# EAGLE board Cansat-2023-2 (EAGLE 9.4.2), part 1 of 2
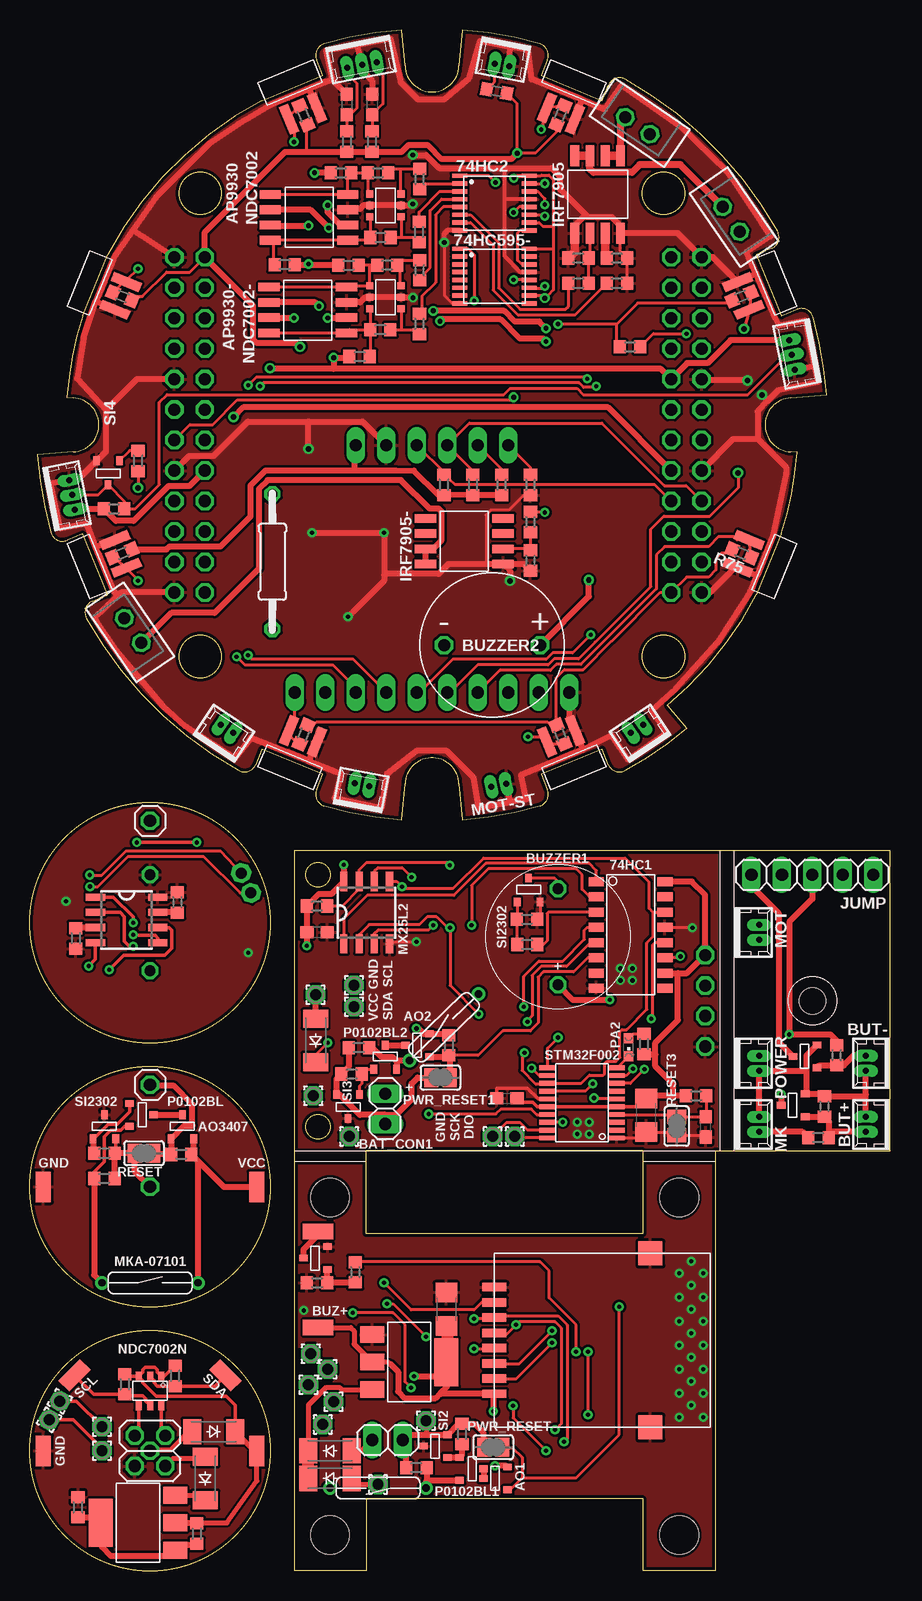
[diagram p0: board, top side]
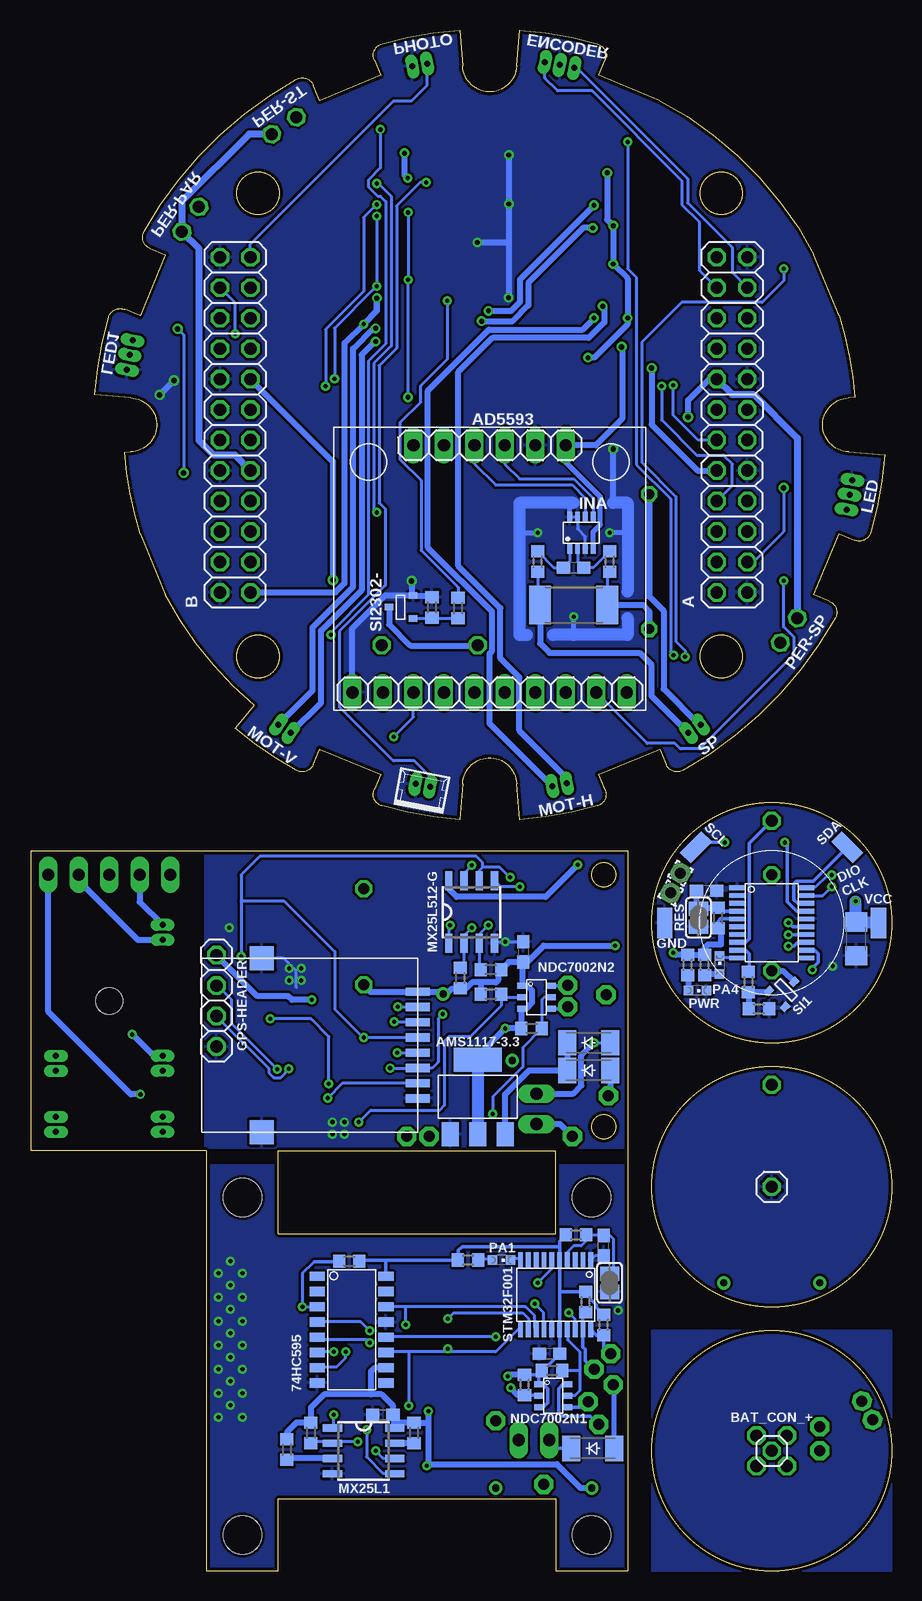
[diagram p1: board, bottom side, seen from below]

Size 71.7 x 128.4 mm. Coordinates in mm from the lower left corner, seen from the top.
Outline: 22,60 22,0 28,0 28,6 51.1,6 51.1,0 57.1,0 57.1,35 71.7,35 71.7,60 22,60
Outline: 51.1,28.1 51.1,35 28,35 28,28.1 51.1,28.1
Outline: 4.38,104.59 6.48,109.67 arc-35 19.33,122.52 24.41,124.62 23.88,125.91 arc-97 24.53,127.26 arc-11 30.99,128.4 31.25,125.42 arc176 35.75,125.42 36.01,128.4 arc-11 42.47,127.26 arc-97 43.12,125.91 42.59,124.62 47.67,122.52 48.2,123.81 arc-97 49.61,124.3 arc-32 62.3,111.61 arc-97 61.81,110.2 60.52,109.67 62.62,104.59 63.91,105.12 arc-97 65.26,104.47 arc-11 66.4,98.01 63.42,97.75 arc176 63.42,93.25 63.92,93.21 arc-13 62.62,86.41 60.52,81.33 arc-22 53.11,72.13 54.71,70.22 arc-11 49.61,66.7 arc-97 48.2,67.19 47.67,68.48 42.59,66.38 43.12,65.09 arc-97 42.47,63.74 arc-11 36.01,62.6 35.75,65.58 arc176 31.25,65.58 30.99,62.6 arc-11 24.53,63.74 arc-97 23.88,65.09 24.41,66.38 19.33,68.48 18.8,67.19 arc-97 17.39,66.7 arc-32 4.7,79.39 arc-97 5.19,80.8 6.48,81.33 4.38,86.41 3.09,85.88 arc-97 1.74,86.53 arc-11 0.6,92.99 3.58,93.25 arc176 3.58,97.75 3.08,97.79 arc-13 4.38,104.59
Outline: circle at 10,10 radius 10
Outline: circle at 10,32 radius 10
Outline: circle at 10,54 radius 10
Outline: circle at 24,37 radius 1
Outline: circle at 24,58 radius 1
Outline: circle at 14.2,76.2 radius 1.75
Outline: circle at 52.8,76.2 radius 1.75
Outline: circle at 52.8,114.8 radius 1.75
Outline: circle at 14.2,114.8 radius 1.75
Copper layers (1*16): Top 0.035mm / dielectric 1.5mm / Bottom 0.035mm
Design rules "rezonit": minimum track width 0.25mm, minimum drill 0.35mm, track to track 0.2mm, track to pad 0.2mm, pad to pad 0.15mm, via to via 0.2mm, smd to smd 0.2mm, copper to edge 0.25mm, drill to drill 0.25mm, minimum pad ring 10mil, minimum via ring 8mil, stop-mask expansion 4mil, vias tented up to drill 0mil, thermal gap 10mil
Holes 3.2 mm at 25,3 54.1,3 54.1,31.1 25,31.1
Holes 2.2 mm at 65.2,47.5

## Footprints (pad centres in the part's own frame; a part is rotated, then mirrored left to right if it is on the bottom)
SOIC16 = smd 1.27 x 0.76: 1 -2.86,4.445; 2 -2.86,3.175; 3 -2.86,1.905; 4 -2.86,0.635; 5 -2.86,-0.635; 6 -2.86,-1.905; 7 -2.86,-3.175; 8 -2.86,-4.445; 9 2.86,-4.445; 10 2.86,-3.175; 11 2.86,-1.905; 12 2.86,-0.635; 13 2.86,0.635; 14 2.86,1.905; 15 2.86,3.175; 16 2.86,4.445
TSSOP16 = smd 1.26 x 0.36: 1 -2.9,2.275; 2 -2.9,1.625; 3 -2.9,0.975; 4 -2.9,0.325; 5 -2.9,-0.325; 6 -2.9,-0.975; 7 -2.9,-1.625; 8 -2.9,-2.275; 9 2.9,-2.275; 10 2.9,-1.625; 11 2.9,-0.975; 12 2.9,-0.325; 13 2.9,0.325; 14 2.9,0.975; 15 2.9,1.625; 16 2.9,2.275
2X12 = drill 1.016 octagon: 1 -13.97,-1.27; 2 -13.97,1.27; 3 -11.43,-1.27; 4 -11.43,1.27; 5 -8.89,-1.27; 6 -8.89,1.27; 7 -6.35,-1.27; 8 -6.35,1.27; 9 -3.81,-1.27; 10 -3.81,1.27; 11 -1.27,-1.27; 12 -1.27,1.27; 13 1.27,-1.27; 14 1.27,1.27; 15 3.81,-1.27; 16 3.81,1.27; 17 6.35,-1.27; 18 6.35,1.27; 19 8.89,-1.27; 20 8.89,1.27; 21 11.43,-1.27; 22 11.43,1.27; 23 13.97,-1.27; 24 13.97,1.27
AD5593 = drill 1.016 long: 1 -11.43,-10.3; 2 -8.89,-10.3; 3 -6.35,-10.3; 4 -3.81,-10.3; 5 -1.27,-10.3; 6 1.27,-10.3; 7 3.81,-10.3; 8 6.35,-10.3; 9 8.89,-10.3; 10 11.43,-10.3; 11 -6.35,10.3; 12 -3.81,10.3; 13 -1.27,10.3; 14 1.27,10.3; 15 3.81,10.3; 16 6.35,10.3
SOT223 = smd 4 x 2: P$1 0,3.1 | smd 1.4 x 2: P$2 -2.29,-3.1; P$3 0,-3.1; P$4 2.29,-3.1
SOT223' = smd 1.4 x 2: 1 -2.29,-3.1; 2 0,-3.1; 3 2.29,-3.1 | smd 4 x 2: 4 0,3.1
SOT23-3 = smd 0.56 x 0.73: 1 -0.95,-1; 2 0.95,-1; 3 0,1
SO8 = smd 0.72 x 1.78: 1 -1.905,-3.23; 2 -0.635,-3.23; 3 0.635,-3.23; 4 1.905,-3.23; 5 1.905,3.23; 6 0.635,3.23; 7 -0.635,3.23; 8 -1.905,3.23
1X02 = drill 1.016 long: 1 -1.27,0; 2 1.27,0
1X01 = drill 1.016 octagon: 1 0,0
53047-02 = drill 0.5 pad 0.698 long: 1 0.625,0.45; 2 -0.625,0.45
SMD1,27-2,54 = smd 1.27 x 2.54: 1 0,0
BUZZER = drill 0.9 octagon: + 0,-4; - 0,4
BUZZER-S8R12 = drill 1 octagon: P$1 -4,0; P$2 4,0
C1206 = smd 1.6 x 1.8: 1 -1.4,0; 2 1.4,0
C0603 = smd 1.1 x 1: 1 -0.85,0; 2 0.85,0
1,6/0,9 = drill 0.914 pad 1.6 octagon: 1 0,0
E01-ML01SP4 = smd 0.7 x 2: 1 -4.445,9; 2 -3.175,9; 3 -1.905,9; 4 -0.635,9; 5 0.635,9; 6 1.905,9; 7 3.175,9; 8 4.445,9 | smd 2 x 2: 9 7.25,-4; 10 -7.25,-4
53047-03 = drill 0.5 pad 0.698 long: 1 1.25,0.45; 2 0,0.45; 3 -1.25,0.45
1X04 = drill 1.016 octagon: 1 -3.81,0; 2 -1.27,0; 3 1.27,0; 4 3.81,0
SOT23-8 = smd 0.9 x 0.4: 1 -1.3,0.975; 2 -1.3,0.325; 3 -1.3,-0.325; 4 -1.3,-0.975; 5 1.3,-0.975; 6 1.3,-0.325; 7 1.3,0.325; 8 1.3,0.975
2X02 = drill 1.016 octagon: 1 -1.27,-1.27; 2 -1.27,1.27; 3 1.27,-1.27; 4 1.27,1.27
1X05 = drill 1.016 long: 1 -5.08,0; 2 -2.54,0; 3 0,0; 4 2.54,0; 5 5.08,0
SOP8 = smd 0.6 x 1.6: 1 -1.905,-2.6; 2 -0.635,-2.6; 3 0.635,-2.6; 4 1.905,-2.6; 5 1.905,2.6; 6 0.635,2.6; 7 -0.635,2.6; 8 -1.905,2.6
SOT23-6 = smd 0.6 x 0.6: 1 -0.95,-1.3; 2 0,-1.3; 3 0.95,-1.3; 4 0.95,1.3; 5 0,1.3; 6 -0.95,1.3
SOT-23-6 = smd 0.5 x 0.8: 1 -0.95,-1.2; 2 0,-1.2; 3 0.95,-1.2; 4 0.95,1.2; 5 0,1.2; 6 -0.95,1.2
CHIPLED_0603 = smd 0.8 x 0.8: A 0,-0.75; C 0,0.75
JST-2-2.5 = drill 1 pad 1.5 octagon: 1 1.25,0; 2 -1.25,0
SJ = smd 1.168 x 1.6: 1 -0.762,0; 2 0.762,0
R0603 = smd 1 x 1.1: 1 -0.85,0; 2 0.85,0
R2512 = smd 1.8 x 3.2: 1 -2.8,0; 2 2.8,0
0207/15 = drill 0.813 octagon: 1 -5.62,0; 2 5.62,0
TSSOP-20 = smd 0.4 x 1.35: 1 -2.925,-2.875; 2 -2.275,-2.875; 3 -1.625,-2.875; 4 -0.975,-2.875; 5 -0.325,-2.875; 6 0.325,-2.875; 7 0.975,-2.875; 8 1.625,-2.875; 9 2.275,-2.875; 10 2.925,-2.875; 11 2.925,2.875; 12 2.275,2.875; 13 1.625,2.875; 14 0.975,2.875; 15 0.325,2.875; 16 -0.325,2.875; 17 -0.975,2.875; 18 -1.625,2.875; 19 -2.275,2.875; 20 -2.925,2.875
SOD-123_MINI-SMA = smd 1.5 x 2.1: A 1.8,0; C -1.8,0
МКА-07101 = drill 0.6: 1 -4,0; 2 4,0
VT93N1 = smd 0.8 x 2.5: P$1 -1.25,-1.8; P$2 1.25,-1.8

## Placement (x,y rotation side)
74HC1  74HC595SOIC16  [SOIC16]  50.05,52.99 0 top
74HC2  74HC595  [TSSOP16]  38.7,113.98 0 top
74HC595  74HC595SOIC16  [SOIC16]  45,20.1 0 bottom
74HC595-  74HC595  [TSSOP16]  38.7,107.9 0 top
A  [2X12]  13.3,95.5 90 bottom
AD5593  AD5593  [AD5593]  33.5,83.5 0 bottom
AMS1117  AMS1117  [SOT223]  31.6,17.4 270 top
AMS1117-3.3  AMS1117  [SOT223']  34.5,39.5 0 bottom
AMS1117-ADJ  AMS1117  [SOT223]  9,4 90 top
AO1  AO3407A  [SOT23-3]  38.8,7.7 90 top
AO2  AO3407A  [SOT23-3]  32.3,43.8 90 top
AO3407  AO3407A  [SOT23-3]  12.7,37 0 top
AP9930  AP9930GM  [SO8]  23.25,112.79 90 top
AP9930-  AP9930GM  [SO8]  23.15,105.07 90 top
B  [2X12]  54.7,95.5 90 bottom
BAT_CON  [1X02]  29.8,10.9 0 top
BAT_CON1  [1X02]  29.6,38.5 270 top
BAT_CON_-  [1X01]  10,32 0 bottom
BUT+  53047-02  [53047-02]  70.1,37.2 90 top
BUT-  53047-02  [53047-02]  70.1,42.3 90 top
BUZ  SI2302CDS  [SOT23-3]  23.8,26.07 90 top
BUZ1  SI2302CDS  [SOT23-3]  41.55,56.74 0 top
BUZ+  [SMD1,27-2,54]  24,20.27 90 top
BUZ-  [SMD1,27-2,54]  24,28.27 90 top
BUZZER  BUZZER-5V  [BUZZER]  10,54 180 bottom
BUZZER1  BUZZER-5V  [BUZZER]  44,52.83 0 top
BUZZER2  BUZZERS8R6  [BUZZER-S8R12]  38.5,77.15 0 top
C1  10µF  [C1206]  34.7,21.8 270 top
C2  100nF  [C0603]  28.5,18.1 0 bottom
C3  10µF  [C1206]  2.95,52.67 90 bottom
C4  100nF  [C0603]  15.42,56.66 180 bottom
C5  100nF  [C0603]  24,27.1 90 bottom
C6  100nF  [C0603]  42.4,13 0 bottom
C7  100nF  [C0603]  23.93,53.21 180 top
C8  10µF  [C1206]  51.35,37.97 90 top
C9  100nF  [C0603]  56.31,37 90 top
C10  100nF  [C0603]  39.74,39.37 0 top
C11  100nF  [C0603]  30.71,51.58 270 bottom
C12  100nF  [C0603]  26.5,83.6 0 bottom
C13  100nF  [C0603]  28.5,122.2 270 top
C14  100nF  [C0603]  26.4,122.2 270 top
CHRG  [1,6/0,9]  23.2,15.5 0 top
CHRG1  [1,6/0,9]  23.8,48 0 top
E01-ML01SP1  E01-ML01SP4  [E01-ML01SP4]  48.49,43.81 270 bottom
E01-ML01SP4  E01-ML01SP4  [E01-ML01SP4]  47.7,19.2 90 top
ENCODER  MOLEX-3-1.25  [53047-03]  27.58,125.93 191 top
GND  [SMD1,27-2,54]  1.1,10 0 top
GND1  [SMD1,27-2,54]  1.1,32 0 top
GND2  [SMD1,27-2,54]  18.9,54 0 bottom
GND3  [1,6/0,9]  33,12.5 0 top
GND4  [1,6/0,9]  26.6,36.2 0 top
GPS-HEADER  [1X04]  56.27,47.5 270 bottom
INA  INA219AID  [SOT23-8]  25.85,86.5 90 bottom
IRF7905  IRF7905  [SO8]  47.3,114.7 0 top
IRF7905-  IRF7905  [SO8]  36.2,85.8 90 top
JP1  [2X02]  10,10 90 top
JP2  [1X01]  10,10 0 bottom
JP3  [1X01]  10,62.5 0 top
JUMP  [1X05]  65.2,58 180 top
LED  MOLEX-3-1.25  [53047-03]  3.07,89.58 281 top
LED1  MOLEX-3-1.25  [53047-03]  63.93,101.42 101 top
MK  53047-02  [53047-02]  60.3,37.2 270 top
MOT  53047-02  [53047-02]  60.3,53.2 270 top
MOT-H  MOLEX-2-1.25  [53047-02]  27.58,65.07 349 top
MOT-ST  MOLEX-2-1.25  [53047-02]  39.15,65.02 349 bottom
MOT-V  MOLEX-2-1.25  [53047-02]  50.83,69.8 34 top
MX25L1  MX25L25645  [SOP8]  44,10 270 bottom
MX25L2  MX25L25645  [SOP8]  28.06,54.85 0 top
MX25L512  MX25L25645  [SOP8]  8.05,54.24 270 top
MX25L512-G  MX25L25645  [SOP8]  35,54.9 0 bottom
NDC7002  NDC7002N  [SOT23-6]  29.62,113.78 90 top
NDC7002-  NDC7002N  [SOT23-6]  29.62,106.13 90 top
NDC7002N  NDC7002N  [SOT-23-6]  10,15 180 top
NDC7002N1  NDC7002N  [SOT-23-6]  28.2,14.6 270 bottom
NDC7002N2  NDC7002N  [SOT-23-6]  29.6,47.81 270 bottom
P0102BL  P0102BL  [SOT23-3]  9.3,38 270 top
P0102BL1  P0102BL  [SOT23-3]  36.8,8.5 270 top
P0102BL2  P0102BL  [SOT23-3]  29.6,42.8 0 top
PA1  [CHIPLED_0603]  32.5,25.9 270 bottom
PA2  [CHIPLED_0603]  49.88,43.63 180 top
PA4  [CHIPLED_0603]  14.33,50.5 0 bottom
PAD1  [1,6/0,9]  2.49,14.15 330 top
PAD2  [1,6/0,9]  1.59,12.59 330 top
PER-PAR  JST-2-2.5  [JST-2-2.5]  58.43,112.63 124.5 top
PER-SP  JST-2-2.5  [JST-2-2.5]  8.57,78.37 304.5 top
PER-ST  JST-2-2.5  [JST-2-2.5]  50.63,120.43 145.5 top
PHOTO  MOLEX-2-1.25  [53047-02]  39.42,125.93 169 top
POWER  53047-02  [53047-02]  60.3,42.3 270 top
PWR  [CHIPLED_0603]  16.18,48.36 270 bottom
PWR-CTRL  [1X01]  10,40.5 0 top
PWR_RESET  [SJ]  38.6,10.3 180 top
PWR_RESET1  [SJ]  34.2,41.1 180 top
R1  1k  [R0603]  13.9,3.1 270 top
R2  1k4  [R0603]  4,5.3 90 top
R3  4k7  [R0603]  7.9,15.55 90 top
R4  4k7  [R0603]  12.1,16.25 90 top
R5  10k x2  [R0603]  6.2,34.8 0 top
R6  10k  [R0603]  6.2,32.7 0 top
R7  10k  [R0603]  12.6,34.7 0 top
R8  1k  [R0603]  15.58,50.5 270 bottom
R9  5k1  [R0603]  14.46,54.42 90 bottom
R10  1k*2  [R0603]  17,50.5 270 bottom
R11  5k1  [R0603]  3.82,52.71 270 top
R12  5k1  [R0603]  12.28,55.71 90 top
R13  5k1  [R0603]  23.93,24 180 top
R14  1k  [R0603]  27.11,24.88 90 top
R15  5k1  [R0603]  26.3,28 0 bottom
R16  1k  [R0603]  35.3,25.9 0 bottom
R17  5k1  [R0603]  11.06,46.84 0 bottom
R18  1k  [R0603]  11.94,49.06 90 bottom
R19  5k1  [R0603]  28.3,16.7 180 bottom
R20  5k1  [R0603]  30.6,15.5 90 bottom
R21  5k1  [R0603]  36,11.4 90 top
R22  5k1  [R0603]  32.2,8.6 180 top
R23  5k1  [R0603]  45.2,25.8 0 bottom
R24  5k1  [R0603]  39.8,11.5 90 bottom
R25  5k1  [R0603]  50.4,10.1 270 bottom
R26  5k1  [R0603]  48.4,11.5 90 bottom
R27  5k1  [R0603]  24,20.5 90 bottom
R28  5k1  [R0603]  25.5,22.4 90 bottom
R29  5k1  [R0603]  41.42,54.29 0 top
R30  1k  [R0603]  41.44,52.19 0 top
R31  5k1  [R0603]  55.51,39.59 0 top
R32  1k  [R0603]  51.16,43.9 90 top
R33  5k1  [R0603]  30,45.2 180 bottom
R34  5k1  [R0603]  33.4,48.05 180 bottom
R35  10k  [R0603]  26.8,41.4 180 top
R36  10k  [R0603]  27.4,43.6 180 top
R37  10k  [R0603]  34.9,43.8 90 top
R38  5k1  [R0603]  35.95,49.4 270 bottom
R39  5k1  [R0603]  23.9,55.4 180 top
R40  5k1  [R0603]  33.4,50.1 0 bottom
R41  10k  [R0603]  67.22,42.97 90 top
R42  10k*2  [R0603]  66.2,38.7 90 top
R43  1k  [R0603]  65.7,36.1 0 top
R44  10k  [R0603]  29,116.5 0 top
R45  100R  [R0603]  36.13,80.23 270 bottom
R46  10R  [R0603]  29.5,84.1 90 bottom
R47  10R  [R0603]  23.5,84.1 90 bottom
R48  R01  [R2512]  26.5,80.5 0 bottom
R49  10k*3  [R0603]  21.23,108.85 0 top
R50  10k  [R0603]  25.9,116.5 180 top
R51  100R  [R0603]  32.45,103.92 90 top
R52  10k  [R0603]  29.19,103.43 0 top
R53  10k  [R0603]  29.21,111.11 0 top
R54  10k  [R0603]  48.9,109.4 0 top
R55  10k  [R0603]  45.7,109.4 180 top
R56  100R  [R0603]  45.7,107.3 180 top
R57  100R  [R0603]  48.9,107.3 180 top
R58  5k1  [R0603]  41.7,90.5 270 top
R59  10k  [R0603]  41.7,84.2 270 top
R60  100R  [R0603]  41.7,87.4 90 top
R61  5k1  [R0603]  39.3,90.5 270 top
R62  5k1  [R0603]  36.9,90.5 90 top
R63  5k1  [R0603]  34.5,90.5 90 top
R64  100R  [R0603]  32.47,115.98 270 top
R65  100R  [R0603]  32.43,111.57 90 top
R66  10k  [R0603]  27.47,101.19 180 top
R67  10k  [R0603]  26.55,108.79 180 top
R68  10k  [R0603]  29.77,108.81 0 top
R69  100R  [R0603]  32.47,108.38 270 top
R70  10k  [R0603]  38.31,80.29 90 bottom
R71  100R  [0207/15]  20.2,84.1 90 top
R72  2k  [R0603]  59.3,106.2 202.5 top
R73  2k  [R0603]  44.2,69.7 112.5 top
R74  2k  [R0603]  22.8,69.7 67.5 top
R75  2k  [R0603]  59.3,84.8 157.5 top
R76  2k  [R0603]  44.2,121.3 247.5 top
R77  2k  [R0603]  22.8,121.3 292.5 top
R78  2k  [R0603]  7.7,84.8 22.5 top
R79  2k  [R0603]  7.7,106.2 337.5 top
R80  5k1  [R0603]  26.4,119.1 270 top
R81  5k1  [R0603]  28.5,119.1 270 top
R82  2k  [R0603]  38.9,123.3 349 top
R83  100R  [R0603]  9,92.5 90 top
R84  4k7  [R0603]  7,88.5 0 top
R85  10k  [R0603]  50,102 180 top
RESET  [SJ]  9.5,34.8 180 top
RESET1  [SJ]  16.1,54.43 90 bottom
RESET2  [SJ]  23.5,24 90 bottom
RESET3  [SJ]  53.9,37.06 90 top
SCL  [SMD1,27-2,54]  3.7,16.3 315 top
SCL1  [SMD1,27-2,54]  16.3,60.3 315 bottom
SCL2  [1,6/0,9]  24.4,12.2 0 top
SCL3  [1,6/0,9]  27,48.8 180 top
SDA  [SMD1,27-2,54]  16.3,16.3 45 top
SDA1  [SMD1,27-2,54]  3.7,60.3 45 bottom
SDA2  [1,6/0,9]  25.3,14.1 0 top
SDA3  [1,6/0,9]  27,47 180 top
SI1  SI2302CDS  [SOT23-3]  8.84,48.37 315 bottom
SI2  SI2302CDS  [SOT23-3]  33.8,10.4 90 top
SI3  SI2302CDS  [SOT23-3]  26.5,38.7 180 top
SI4  SI2302CDS  [SOT23-3]  6.5,91.5 180 top
SI2302  SI2302CDS  [SOT23-3]  6.2,37 0 top
SI2302-  SI2302CDS  [SOT23-3]  40.88,80.32 90 bottom
SP  MOLEX-2-1.25  [53047-02]  16.17,69.8 326 top
STM32F001  STM32F042F6P6  [TSSOP-20]  28,23 180 bottom
STM32F002  STM32F042F6P6  [TSSOP-20]  46,39 90 top
STM32F042  STM32F042F6P6  [TSSOP-20]  10,54 270 bottom
SW  [1,6/0,9]  6,12 0 top
SWC  [1,6/0,9]  17.6,58.15 330 bottom
SWC1  [1,6/0,9]  23.4,18.1 0 top
SWC2  [1,6/0,9]  40.4,36.2 180 top
SWD  [1,6/0,9]  6,10 0 top
SWD1  [1,6/0,9]  18.41,56.49 330 bottom
SWD2  [1,6/0,9]  24.8,16.8 0 top
SWD3  [1,6/0,9]  38.55,36.2 180 top
U$1  MBR0530T1G  [SOD-123_MINI-SMA]  14.6,7.7 90 top
U$2  MBR0530T1G  [SOD-123_MINI-SMA]  15.3,11.6 180 top
U$3  МКА-07101  [МКА-07101]  29,6.9 180 top
U$4  MBR0530T1G  [SOD-123_MINI-SMA]  25,10 0 top
U$5  MBR0530T1G  [SOD-123_MINI-SMA]  24.9,10.2 0 bottom
U$6  MBR0530T1G  [SOD-123_MINI-SMA]  25,7.7 0 top
U$7  МКА-07101  [МКА-07101]  34.5,45.3 44 top
U$8  MBR0530T1G  [SOD-123_MINI-SMA]  25.25,41.7 0 bottom
U$9  MBR0530T1G  [SOD-123_MINI-SMA]  23.8,44.2 90 top
U$10  MBR0530T1G  [SOD-123_MINI-SMA]  25.25,44 0 bottom
U$11  SI2302CDS  [SOT23-3]  63.6,38.8 90 top
U$12  VT93N1  [VT93N1]  61.11,84.06 247.5 top
U$15  VT93N1  [VT93N1]  22.06,67.89 157.5 top
U$17  VT93N1  [VT93N1]  44.94,67.89 202.5 top
U$18  VT93N1  [VT93N1]  61.11,106.94 292.5 top
U$19  VT93N1  [VT93N1]  44.94,123.11 337.5 top
U$21  SI2302CDS  [SOT23-3]  64.58,42.87 90 top
U$22  VT93N1  [VT93N1]  22.06,123.11 22.5 top
U$23  VT93N1  [VT93N1]  5.89,84.06 112.5 top
U$24  VT93N1  [VT93N1]  5.89,106.94 67.5 top
VCC  [SMD1,27-2,54]  18.9,10 180 top
VCC1  [SMD1,27-2,54]  18.9,32 0 top
VCC2  [SMD1,27-2,54]  1.1,54 0 bottom
VIN  [1,6/0,9]  29,7.2 0 top
VIN1  [1,6/0,9]  23.6,39.6 0 top
МКА-07101  МКА-07101  [МКА-07101]  10,24 0 top

## Library data of the parts
74HC1 74HC2 74HC595 74HC595- AD5593 AMS1117 AMS1117-ADJ AO1 AO2 AO3407 AP9930 AP9930- BUZ BUZ1 BUZZER BUZZER1 BUZZER2 E01-ML01SP1 E01-ML01SP4 ENCODER INA IRF7905 IRF7905- LED LED1 MOT-H MOT-ST MOT-V NDC7002 NDC7002- PER-PAR PER-SP PER-ST PHOTO SI1-SI4 SI2302 SI2302- SP U$1 U$2 U$4-U$6 U$8-U$11 U$21 = CanCubeSat
A B BAT_CON BAT_CON1 BAT_CON_- JP1-JP3 JUMP PWR-CTRL = pinhead
AMS1117-3.3 P0102BL P0102BL1 P0102BL2 STM32F001 STM32F002 STM32F042 U$3 U$7 МКА-07101 = Kunosheru
BUT+ BUT- MK MOT POWER = con-molex; MF: MOLEX; MPN: 53047-0210; OC_FARNELL: 9733051; OC_NEWARK: 57H4701
BUZ+ BUZ- CHRG CHRG1 GND GND1-GND4 PAD1 PAD2 SCL SCL1-SCL3 SDA SDA1-SDA3 SW SWC SWC1 SWC2 SWD SWD1-SWD3 VCC VCC1 VCC2 VIN VIN1 = wirepad
C1-C14 = rcl; SPICEPREFIX: C
GPS-HEADER MX25L1 MX25L2 MX25L512 MX25L512-G NDC7002N NDC7002N1 NDC7002N2 = HM
PA1 PA2 PA4 PWR = led
PWR_RESET PWR_RESET1 RESET RESET1-RESET3 = jumper
R1-R70 R72-R85 = rcl; SPICEPREFIX: R
R71 = CanCubeSat; SPICEPREFIX: R
U$12 U$15 U$17-U$19 U$22-U$24 = KNPN-2023

## Nets
3V3: 74HC2.10 74HC2.16 74HC595-.10 74HC595-.16 A.24 AD5593.16 B.1 INA.4 R61.2 R62.1 R63.1 R72.2 R73.2 R74.2 R75.2 R76.2 R77.2 R78.2 R79.2 R80.2 R81.2 R82.2 R85.2
5V: A.10 AP9930-.7 AP9930.7 B.15 BUZZER2.P$2 LED1.1 LED.1 R49.2 R50.2 R66.2 R67.2 R84.1
12V: JUMP.3 POWER.2 R41.2
BUZZER: R18.2 STM32F042.9
BUZZER1: 74HC595.7 R14.2
BUZZER2: 74HC1.3 R30.2
BUZZER3: 74HC595-.1 R45.1
CS: MX25L512.1 STM32F042.15
ENCOD_A: A.21 C14.2 ENCODER.1 R80.1
ENCOD_B: A.22 C13.2 ENCODER.3 R81.1
FOTO1: AD5593.3 R73.1 U$17.P$2
FOTO2: AD5593.4 R75.1 U$12.P$1
FOTO3: AD5593.5 R72.1 U$18.P$2
FOTO4: AD5593.6 R76.1 U$19.P$1
FOTO5: AD5593.7 R77.1 U$22.P$1
FOTO6: AD5593.8 R79.1 U$24.P$2
FOTO7: AD5593.9 R78.1 U$23.P$1
FOTO8: AD5593.10 R74.1 U$15.P$2
FOTO9: B.23 PHOTO.1 R82.1
GND: GND.1 JP1.2 R2.2
GND1: GND1.1 SI2302.3
GND2: C3.1 C4.1 GND2.1 MX25L512.4 PWR.C R17.2 RESET1.1 SI1.2 STM32F042.1 STM32F042.16
GND3: 74HC595.8 74HC595.13 AMS1117.P$2 BUZ.2 C1.1 C2.1 C5.1 C6.1 E01-ML01SP4.8 E01-ML01SP4.9 E01-ML01SP4.10 MX25L1.4 R13.2 RESET2.1 SI2.3 STM32F001.1 STM32F001.15
GND4: PA1.C STM32F001.10
GND5: 74HC1.8 74HC1.13 AMS1117-3.3.1 BUZ1.2 C7.1 C8.1 C9.1 C10.1 C11.1 E01-ML01SP1.8 E01-ML01SP1.9 E01-ML01SP1.10 GPS-HEADER.4 MX25L2.4 MX25L512-G.4 R29.2 RESET3.1 SI3.3 STM32F002.1 STM32F002.15
GND6: PA2.C STM32F002.10
GND7: BUT+.1 BUT-.2 MK.2 POWER.1 R42.2 U$11.2 U$21.2
GND8: 74HC2.8 74HC2.13 74HC595-.8 74HC595-.13 A.1 A.9 A.15 A.23 AD5593.1 AD5593.15 AP9930-.3 AP9930.3 B.2 B.10 B.16 B.24 C13.1 C14.1 ENCODER.2 INA.3 INA.7 INA.8 IRF7905-.1 IRF7905.1 IRF7905.4 LED1.3 LED.3 MOT-ST.2 NDC7002-.2 NDC7002-.5 NDC7002.2 NDC7002.5 PHOTO.2 R54.2 R55.2 R57.1 R58.2 R59.2 R70.2 SI4.2 SI2302-.2 U$12.P$2 U$15.P$1 U$17.P$1 U$18.P$1 U$19.P$2 U$22.P$2 U$23.P$2 U$24.P$1
HLD: MX25L2.7 MX25L512-G.7 R39.1
INA_SP+: R47.1 R48.2 R71.1
IRQ: E01-ML01SP4.7 STM32F001.6
IRQ1: E01-ML01SP1.7 STM32F002.6
LATCH: 74HC595.12 STM32F001.14
LATCH1: 74HC1.12 STM32F002.14
LATCH2: 74HC2.12 74HC595-.12 A.11
LED: A.3 R83.1
MEM_CS: 74HC595.6 MX25L1.1
MEM_CS1: 74HC1.1 MX25L2.1
MEM_G_CS: 74HC1.2 MX25L512-G.1
MISO: MX25L512.2 STM32F042.13
MISO1: E01-ML01SP4.6 MX25L1.2 R26.1 STM32F001.12
MISO2: E01-ML01SP1.6 MX25L2.2 MX25L512-G.2 R38.1 STM32F002.12
MISO3: A.7
MK_MOTOR1+: 74HC2.4 R69.2
MK_MOTOR1-: 74HC2.5 R51.2
MK_MOTOR2+: 74HC2.2 R64.2
MK_MOTOR2-: 74HC2.3 R65.2
MOSI: MX25L512.5 STM32F042.14
MOSI1: 74HC595.14 E01-ML01SP4.5 MX25L1.5 STM32F001.13
MOSI2: 74HC1.14 E01-ML01SP1.5 MX25L2.5 MX25L512-G.5 STM32F002.13
MOSI3: 74HC2.14 A.8
MOTOR1+: AP9930-.6 MOT-H.2
MOTOR1-: AP9930-.2 MOT-H.1
MOTOR2+: AP9930.6 MOT-V.2
MOTOR2-: AP9930.2 MOT-V.1
MOTOR3+: JUMP.4 MOT.2
MOTOR3+G: JUMP.5 U$21.3
MOTOR3-: JUMP.2 MOT.1
MOTOR3-G: JUMP.1 U$11.3
N$1: JP1.1 U$1.A
N$2: JP2.1 U$2.A
N$3: AMS1117-ADJ.P$1 AMS1117-ADJ.P$2 R1.2 R2.1
N$4: NDC7002N.5 R3.1 SCL.1
N$5: PAD2.1 SWD.1
N$6: NDC7002N.2 R4.1 SDA.1
N$7: P0102BL.1 R5.1 SI2302.1
N$8: P0102BL.2 R6.1 МКА-07101.1
N$9: AO3407.3 P0102BL.3
N$10: BAT_CON_-.1 R5.2 R6.2 RESET.2 SI2302.2
N$11: AO3407.1 PWR-CTRL.1 R7.1 RESET.1
N$12: PWR.A R10.2
N$13: R17.1 R18.1 SI1.1
N$14: BUZZER.- SI1.3
N$15: PA4.A R8.2
N$16: PA4.C STM32F042.10
N$17: JP3.1 STM32F042.8
N$18: MX25L512.3 R11.1
N$19: MX25L512.7 R12.1
N$20: STM32F042.20 SWC.1
N$21: STM32F042.19 SWD1.1
N$22: BUZ.1 R13.1 R14.1
N$23: BUZ-.1 BUZ.3
N$24: R27.1 STM32F001.20 SWC1.1
N$25: PA1.A R16.2
N$26: P0102BL1.1 R21.1 SI2.1
N$27: P0102BL1.2 R22.1 U$3.1
N$28: AO1.3 P0102BL1.3
N$29: BAT_CON.2 GND3.1 PWR_RESET.2 R21.2 R22.2 SI2.2
N$30: MX25L1.7 R24.1
N$31: MX25L1.3 R25.2
N$32: BAT_CON.1 U$4.A U$5.C
N$33: U$6.A VIN.1
N$34: CHRG.1 U$5.A
N$35: R28.1 STM32F001.19 SWD2.1
N$36: NDC7002N1.6 SCL2.1
N$37: BUZ1.1 R29.1 R30.1
N$38: BUZ1.3 BUZZER1.-
N$39: PA2.A R32.2
N$40: P0102BL2.1 R35.1 SI3.1
N$41: P0102BL2.2 R36.1 U$7.1
N$42: AO2.3 P0102BL2.3
N$43: BAT_CON1.2 GND4.1 PWR_RESET1.2 R35.2 R36.2 SI3.2
N$44: U$8.A VIN1.1
N$45: CHRG1.1 U$9.A
N$46: BAT_CON1.1 U$9.C U$10.A
N$47: STM32F002.20 SWC2.1
N$48: STM32F002.19 SWD3.1
N$49: BUT-.1 R41.1 U$21.1
N$50: BUT+.2 R42.1 R43.2 U$11.1
N$51: BUZZER2.P$1 SI2302-.3
N$52: R45.2 R70.1 SI2302-.1
N$53: C12.1 INA.1 R46.2
N$54: C12.2 INA.2 R47.2
N$55: AP9930.1 AP9930.8 NDC7002.6 R49.1 R53.1
N$56: NDC7002.3 R44.2 R64.1
N$57: NDC7002.1 R53.2 R65.1
N$58: AP9930.4 AP9930.5 NDC7002.4 R44.1 R50.1
N$59: AP9930-.1 AP9930-.8 NDC7002-.6 R52.1 R66.1
N$60: NDC7002-.3 R68.2 R69.1
N$61: NDC7002-.1 R51.1 R52.2
N$62: AP9930-.4 AP9930-.5 NDC7002-.4 R67.1 R68.1
N$63: IRF7905.3 R54.1
N$64: IRF7905.2 R55.1 R56.1
N$65: IRF7905-.2 R59.1 R60.1
N$66: AD5593.12 R61.1
N$67: AD5593.11 R58.1
N$68: R83.2 SI4.1
N$69: LED1.2 LED.2 R84.2 SI4.3
N$70: 74HC2.9 74HC595-.14
NOE: STM32F002.7
PERE1: 74HC2.6 R56.2
PERE1_G: IRF7905.7 IRF7905.8 PER-PAR.1
PERE2: 74HC2.7 R57.2
PERE2_G: IRF7905.5 IRF7905.6 PER-ST.1
PERE3: 74HC2.15 R60.2
PERE3_G: IRF7905-.7 IRF7905-.8 PER-SP.1
PWR_CTRL: 74HC595.3 AO1.1 PWR_RESET.1 R23.1
PWR_CTRL1: 74HC1.6 AO2.1 PWR_RESET1.1 R37.1
RESET: C4.2 R9.2 RESET1.2 STM32F042.4
RESET1: C5.2 R15.2 RESET2.2 STM32F001.4
RESET2: C9.2 R31.2 RESET3.2 STM32F002.4
RF-CS: 74HC595.4 E01-ML01SP4.3
RF_CE: 74HC595.5 E01-ML01SP4.2
RF_CE1: 74HC1.4 E01-ML01SP1.2
RF_CS: 74HC1.5 E01-ML01SP1.3
RX: GPS-HEADER.3 STM32F002.9
SCK: MX25L512.6 STM32F042.12
SCK1: 74HC595.11 E01-ML01SP4.4 MX25L1.6 STM32F001.11
SCK2: 74HC1.11 E01-ML01SP1.4 MX25L2.6 MX25L512-G.6 STM32F002.11
SCK3: 74HC2.11 74HC595-.11 A.12
SCL: JP1.3 NDC7002N.6
SCL1: SCL1.1 STM32F042.17
SCL2: AD5593.14 B.7 INA.5 R63.2
SCL-A: NDC7002N2.6 SCL3.1
SCL-B: NDC7002N1.5 R19.1 STM32F001.17
SCL-B1: NDC7002N2.5 R33.1 STM32F002.17
SDA: JP1.4 NDC7002N.4
SDA1: SDA1.1 STM32F042.18
SDA2: AD5593.13 B.8 INA.6 R62.2
SDA-A: NDC7002N1.4 SDA2.1
SDA-A1: NDC7002N2.4 SDA3.1
SDA-B: NDC7002N1.2 R20.1 STM32F001.18
SDA-B1: NDC7002N2.2 R34.1 STM32F002.18
SP+: R46.1 R48.1 SP.1
SP-: R71.2 SP.2
SWC: PAD1.1 SW.1
SWITCH: B.22 R85.1
TRUBKI: MK.1 R43.1
TRUBKI1: 74HC2.1 MOT-ST.1
TX: GPS-HEADER.2 STM32F002.8
VAB: A.16 B.9 PER-PAR.2 PER-SP.2 PER-ST.2
VCC: AMS1117-ADJ.P$3 NDC7002N.1 NDC7002N.3 R1.1 R3.2 R4.2 U$2.C VCC.1
VCC1: AO3407.2 R7.2 VCC1.1 МКА-07101.2
VCC2: BUZZER.+ C3.2 MX25L512.8 R8.1 R9.1 R10.1 R11.2 R12.2 STM32F042.5 VCC2.1
VCC3: 74HC595.10 74HC595.16 AMS1117.P$1 AMS1117.P$3 AO1.2 BUZ+.1 C1.2 C2.2 C6.2 E01-ML01SP4.1 MX25L1.8 NDC7002N1.1 NDC7002N1.3 R15.1 R16.1 R19.2 R20.2 R23.2 R24.2 R25.1 R26.2 R27.2 R28.2 STM32F001.5 STM32F001.16 U$3.2
VCC4: 74HC1.10 74HC1.16 AMS1117-3.3.2 AMS1117-3.3.4 AO2.2 BUZZER1.+ C7.2 C8.2 C10.2 C11.2 E01-ML01SP1.1 GPS-HEADER.1 MX25L2.8 MX25L512-G.8 NDC7002N2.1 NDC7002N2.3 R31.1 R32.1 R33.2 R34.2 R37.2 R38.2 R39.2 R40.2 STM32F002.5 STM32F002.16 U$7.2
VCC/1: AMS1117.P$4 U$4.C U$6.C
VCC/2: AMS1117-ADJ.P$4 U$1.C
VCC/3: AMS1117-3.3.3 U$8.C U$10.C
WP: MX25L2.3 MX25L512-G.3 R40.1